# EAGLE board LN Sensorr (EAGLE 9.6.1)
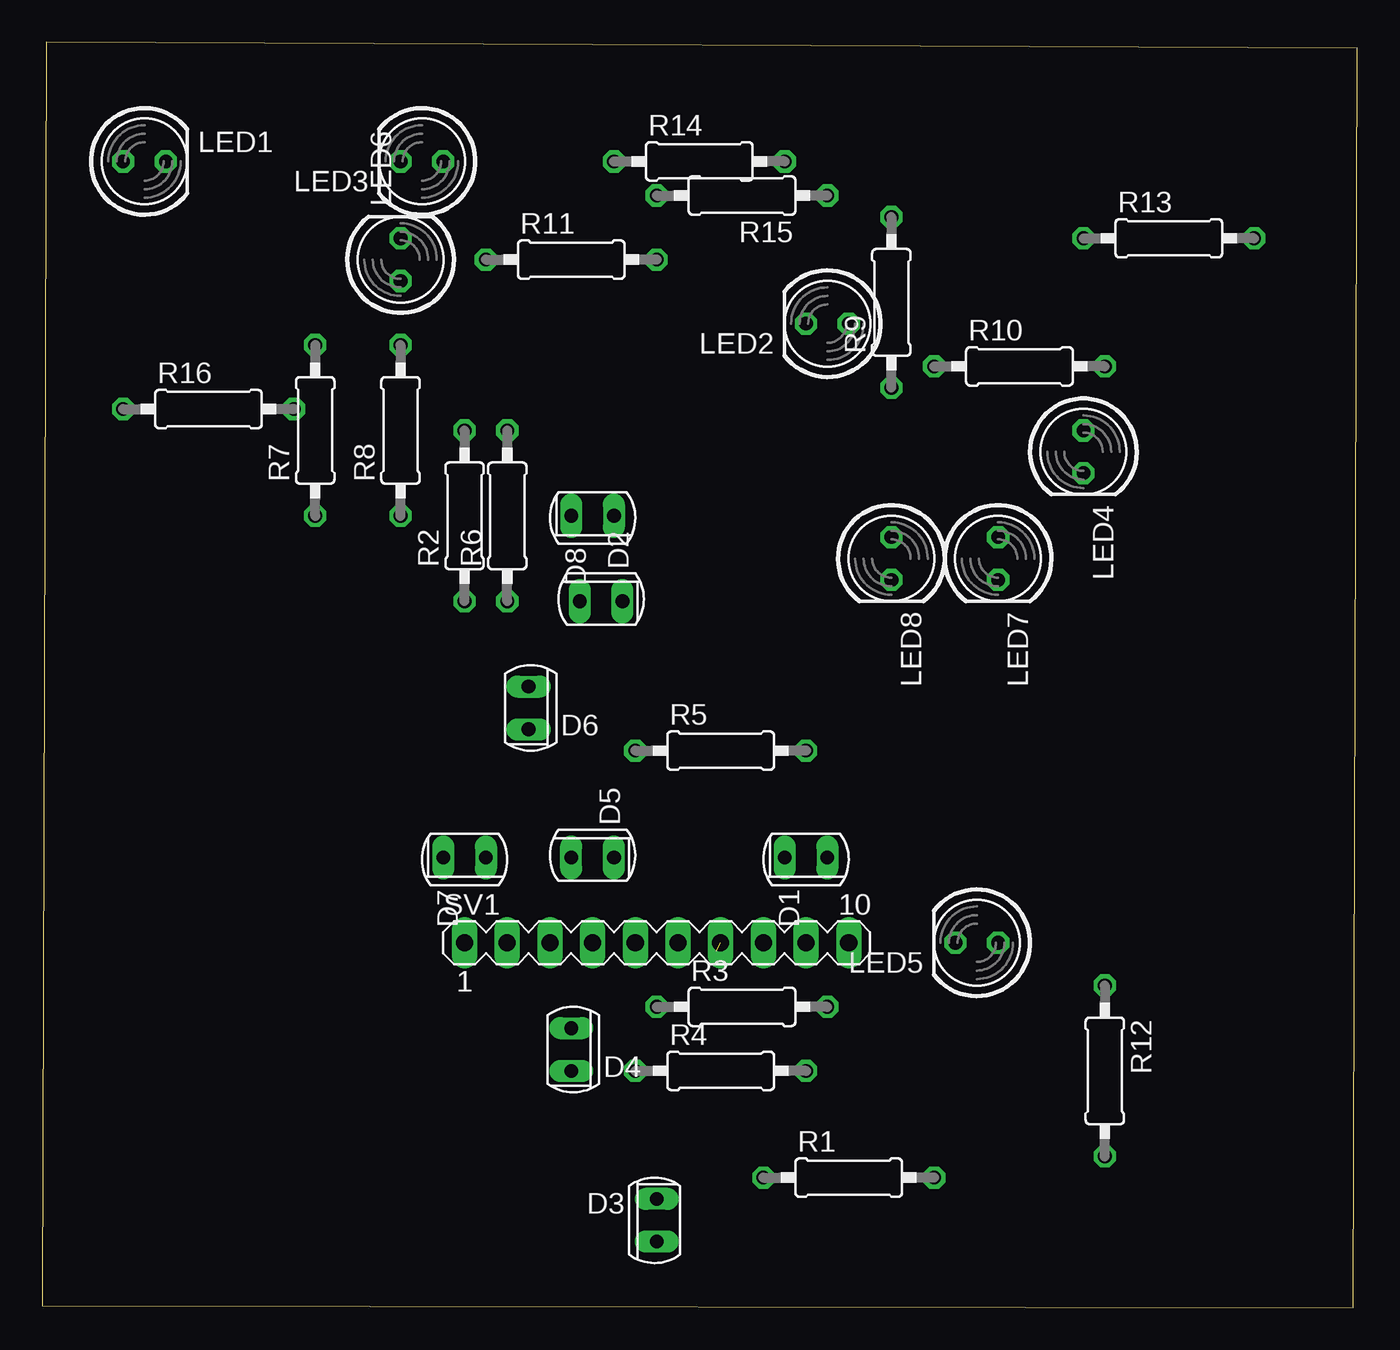
[diagram p0: board, top side]
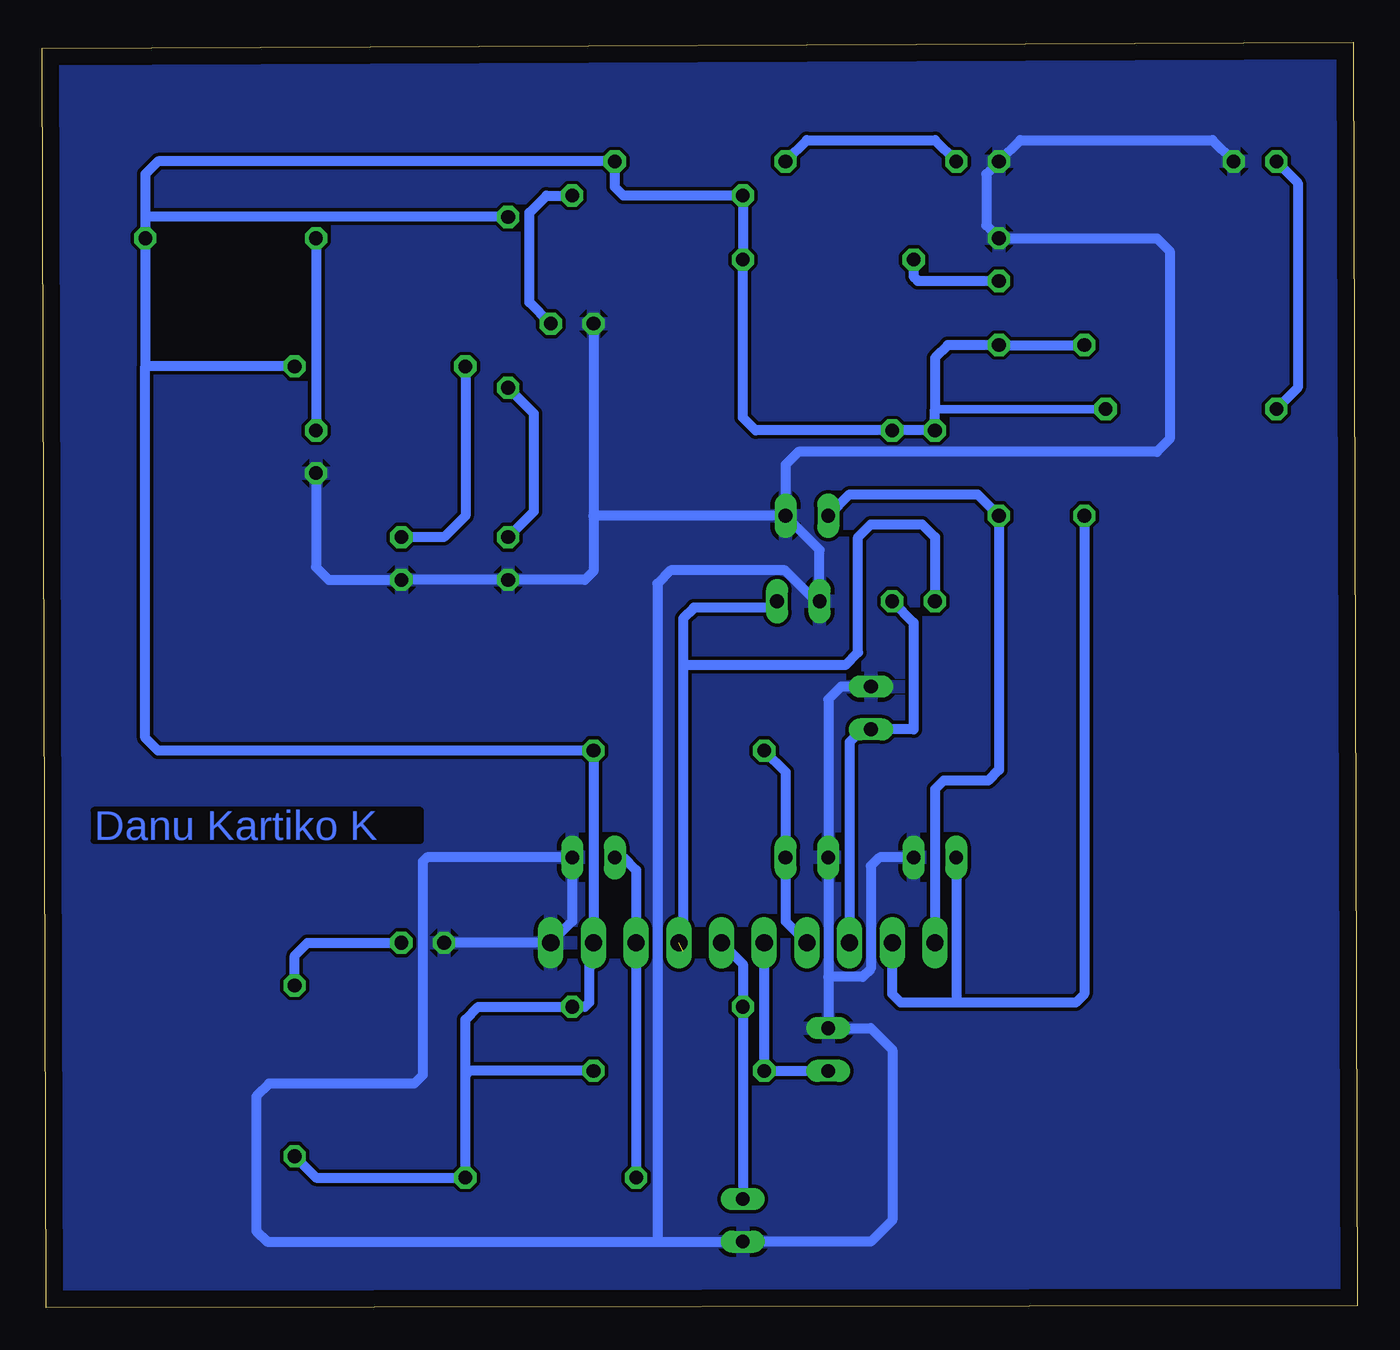
[diagram p1: board, bottom side, seen from below]

Size 78.28 x 75.3 mm. Coordinates in mm from the lower left corner, seen from the top.
Outline: 0,0.13 78.03,0 78.28,74.92 0.25,75.3 0,0.13
Copper layers (1*16): Top 0.035mm / dielectric 1.5mm / Bottom 0.035mm
Design rules "default": minimum track width 10mil, minimum drill 24mil, track to track 8mil, track to pad 8mil, pad to pad 8mil, via to via 8mil, smd to smd 8mil, copper to edge 40mil, drill to drill 8mil, minimum pad ring 10mil, minimum via ring 8mil, stop-mask expansion 4mil, vias tented up to drill 0mil, thermal gap 10mil

## Footprints (pad centres in the part's own frame; a part is rotated, then mirrored left to right if it is on the bottom)
SFH225 = drill 0.813 long: A 0,1.27; K 0,-1.27
LED5MM = drill 0.813 octagon: A -1.27,0; K 1.27,0
0207/10 = drill 0.813 octagon: 1 -5.08,0; 2 5.08,0
MA10-1 = drill 1.016 long: 1 -11.43,0; 2 -8.89,0; 3 -6.35,0; 4 -3.81,0; 5 -1.27,0; 6 1.27,0; 7 3.81,0; 8 6.35,0; 9 8.89,0; 10 11.43,0

## Placement (x,y rotation side)
D1  PhotoDioda  [SFH225]  45.47,26.8 270 top
D2  PhotoDioda  [SFH225]  33.27,42.04 90 top
D3  PhotoDioda  [SFH225]  36.58,5.21 180 top
D4  PhotoDioda  [SFH225]  31.5,15.37 0 top
D5  PhotoDioda  [SFH225]  32.77,26.8 90 top
D6  PhotoDioda  [SFH225]  28.96,35.69 0 top
D7  PhotoDioda  [SFH225]  25.15,26.8 270 top
D8  PhotoDioda  [SFH225]  32.77,47.12 270 top
LED1  LED putih SB  [LED5MM]  6.1,68.2 0 top
LED2  LED putih SB  [LED5MM]  46.74,58.55 180 top
LED3  LED putih SB  [LED5MM]  22.61,68.2 180 top
LED4  LED putih SB  [LED5MM]  61.98,50.93 270 top
LED5  LED putih SB  [LED5MM]  55.63,21.72 180 top
LED6  LED putih SB  [LED5MM]  21.34,62.36 90 top
LED7  LED putih SB  [LED5MM]  56.9,44.58 270 top
LED8  LED putih SB  [LED5MM]  50.55,44.58 270 top
R1  [0207/10]  48.01,7.75 0 top
R2  [0207/10]  25.15,47.12 90 top
R3  [0207/10]  41.66,17.91 0 top
R4  [0207/10]  40.39,14.1 0 top
R5  [0207/10]  40.39,33.15 0 top
R6  [0207/10]  27.69,47.12 90 top
R7  [0207/10]  16.26,52.2 90 top
R8  [0207/10]  21.34,52.2 90 top
R9  330  [0207/10]  50.55,59.82 90 top
R10  330  [0207/10]  58.17,56.01 0 top
R11  330  [0207/10]  31.5,62.36 0 top
R12  330  [0207/10]  63.25,14.1 270 top
R13  330  [0207/10]  67.06,63.63 0 top
R14  330  [0207/10]  39.12,68.2 0 top
R15  330  [0207/10]  41.66,66.17 180 top
R16  330  [0207/10]  9.91,53.47 0 top
SV1  [MA10-1]  36.58,21.72 0 top

## Library data of the parts
D1-D8 = opto-trans-siemens
LED1-LED8 = led
R1-R16 = resistor
SV1 = con-lstb

## Nets
GND: D1.A D2.A D3.A D4.A D5.A D6.A D7.A D8.A LED1.K LED2.K LED3.K LED4.K LED5.K LED6.K LED7.K LED8.K SV1.10
N$1: LED7.A R10.1
N$2: D7.K R7.1 SV1.2
N$3: D8.K R8.1 SV1.1
N$4: D1.K R1.1 SV1.8
N$5: D2.K R2.1 SV1.7
N$6: D3.K R3.1 SV1.6
N$7: D5.K R5.1 SV1.4
N$8: D4.K R4.1 SV1.5
N$9: D6.K R6.1 SV1.3
N$10: LED6.A R11.1
N$11: LED5.A R12.1
N$12: LED4.A R13.1
N$13: LED3.A R14.1
N$14: LED2.A R15.1
N$15: LED1.A R16.1
N$16: LED8.A R9.1
VCC: R1.2 R2.2 R3.2 R4.2 R5.2 R6.2 R7.2 R8.2 R9.2 R10.2 R11.2 R12.2 R13.2 R14.2 R15.2 R16.2 SV1.9

## Tracks (layer width: path | path; a pad name or v marks a point on that pad's centre or on a via)
GND
  Bottom 0.61: LED5.K SV1.10 46.74,22.99 D1.A 55.37,26.8 55.63,26.54 55.63,13.84 56.13,13.33 64.77,13.33 65.53,12.57 65.53,4.57 64.9,3.94 41.66,3.94 | 31.5,19.69 D5.A 31.5,36.2 30.73,36.96 D6.A | 31.5,19.69 D4.A 28.96,16.64 27.69,15.37 27.69,5.21 28.96,3.94 D3.A 41.66,3.94 | D8.A 34.04,50.16 33.27,50.93 11.94,50.93 11.18,51.69 11.18,62.87 11.94,63.63 LED6.K 22.1,64.39 22.1,67.44 LED3.K 20.07,69.47 8.64,69.47 LED1.K | LED4.K 61.98,44.07 61.21,43.31 LED7.K LED8.K 45.97,43.31 45.47,43.81 45.47,47.12 | LED2.K 45.47,47.12 | D8.A 45.47,47.12 | 31.5,19.69 29.45,19.69 28.96,20.17 28.96,26.29 28.45,26.8 D7.A | D8.A 32,45.09 D2.A 32.23,42.04 34.06,43.87 40.87,43.87 41.66,43.08 41.66,3.94
  pour Bottom: 0,75.06 77.98,75.06 77.98,0.13 0,0.13
N$1
  Bottom 0.61: R10.1 53.09,47.12 54.36,45.85 LED7.A
N$2
  Bottom 0.61: 23.88,18.16 16.76,18.16 16.26,18.67 R7.1 | 23.88,18.16 27.18,18.16 27.69,18.67 SV1.2 | D7.K 23.88,18.16
N$3
  Bottom 0.61: D8.K 30.23,48.39 22.61,48.39 R8.1 21.34,32 21.97,31.37 24.64,31.37 25.15,30.86 SV1.1
N$4
  Bottom 0.61: R1.1 SV1.8 42.93,26.03 43.69,26.8 D1.K
N$5  (1 unrouted)
  Bottom 0.61: D2.K 34.92,41.66 39.5,41.66 40.13,41.02 40.13,38.23 | 40.13,38.23 40.13,21.21 | 40.13,38.23 30.48,38.23 29.72,38.99 29.72,45.85 28.96,46.61 25.91,46.61 25.15,45.85 R2.1
N$6
  Bottom 0.61: D3.K R3.1 36.58,20.45 SV1.6
N$7
  Bottom 0.61: SV1.4 34.04,22.99 D5.K 34.04,31.88 R5.1
N$8
  Bottom 0.61: SV1.5 R4.1 D4.K
N$9
  Bottom 0.61: R6.1 26.42,40.77 26.42,34.42 D6.K 29.46,34.42 30.23,33.66 SV1.3
N$10
  Bottom 0.61: R11.1 26.42,61.34 26.16,61.09 LED6.A
N$11
  Bottom 0.61: R12.1 63.25,20.95 62.48,21.72 LED5.A
N$12
  Bottom 0.61: R13.1 LED4.A
N$13
  Bottom 0.61: LED3.A 25.15,69.47 32.77,69.47 R14.1
N$14
  Bottom 0.61: LED2.A 49.28,59.82 49.28,65.15 48.26,66.17 R15.1
N$15
  Bottom 0.61: LED1.A 3.56,66.93 3.56,54.74 R16.1
N$16
  Bottom 0.61: LED8.A 49.02,47.37 49.02,53.21 R9.1
VCC
  Bottom 0.508: R16.2 25.15,53.47
  Bottom 0.61: SV1.9 45.47,20.45 | R12.2 61.98,7.75 R1.2 53.09,13.84 | R7.2 R8.2 24.38,57.28 25.15,56.51 25.15,53.47 R2.2 R6.2 35.81,52.2 36.58,52.96 R11.2 R15.2 43.69,66.17 44.2,66.68 R14.2 71.37,68.2 72.14,67.44 R13.2 | R9.2 72.14,64.9 R13.2 | SV1.9 R5.2 71.37,33.15 72.14,33.91 72.14,56.01 | R13.2 72.14,56.01 | 53.09,13.84 53.09,17.15 52.32,17.91 R3.2 45.97,17.91 45.72,18.16 45.72,21.46 SV1.9 | R4.2 52.83,14.1 53.09,13.84 | R10.2 72.14,56.01

## Text on the board
Bottom: Danu Kartiko K